# EAGLE board Frontboard2 (EAGLE 9.0.1)
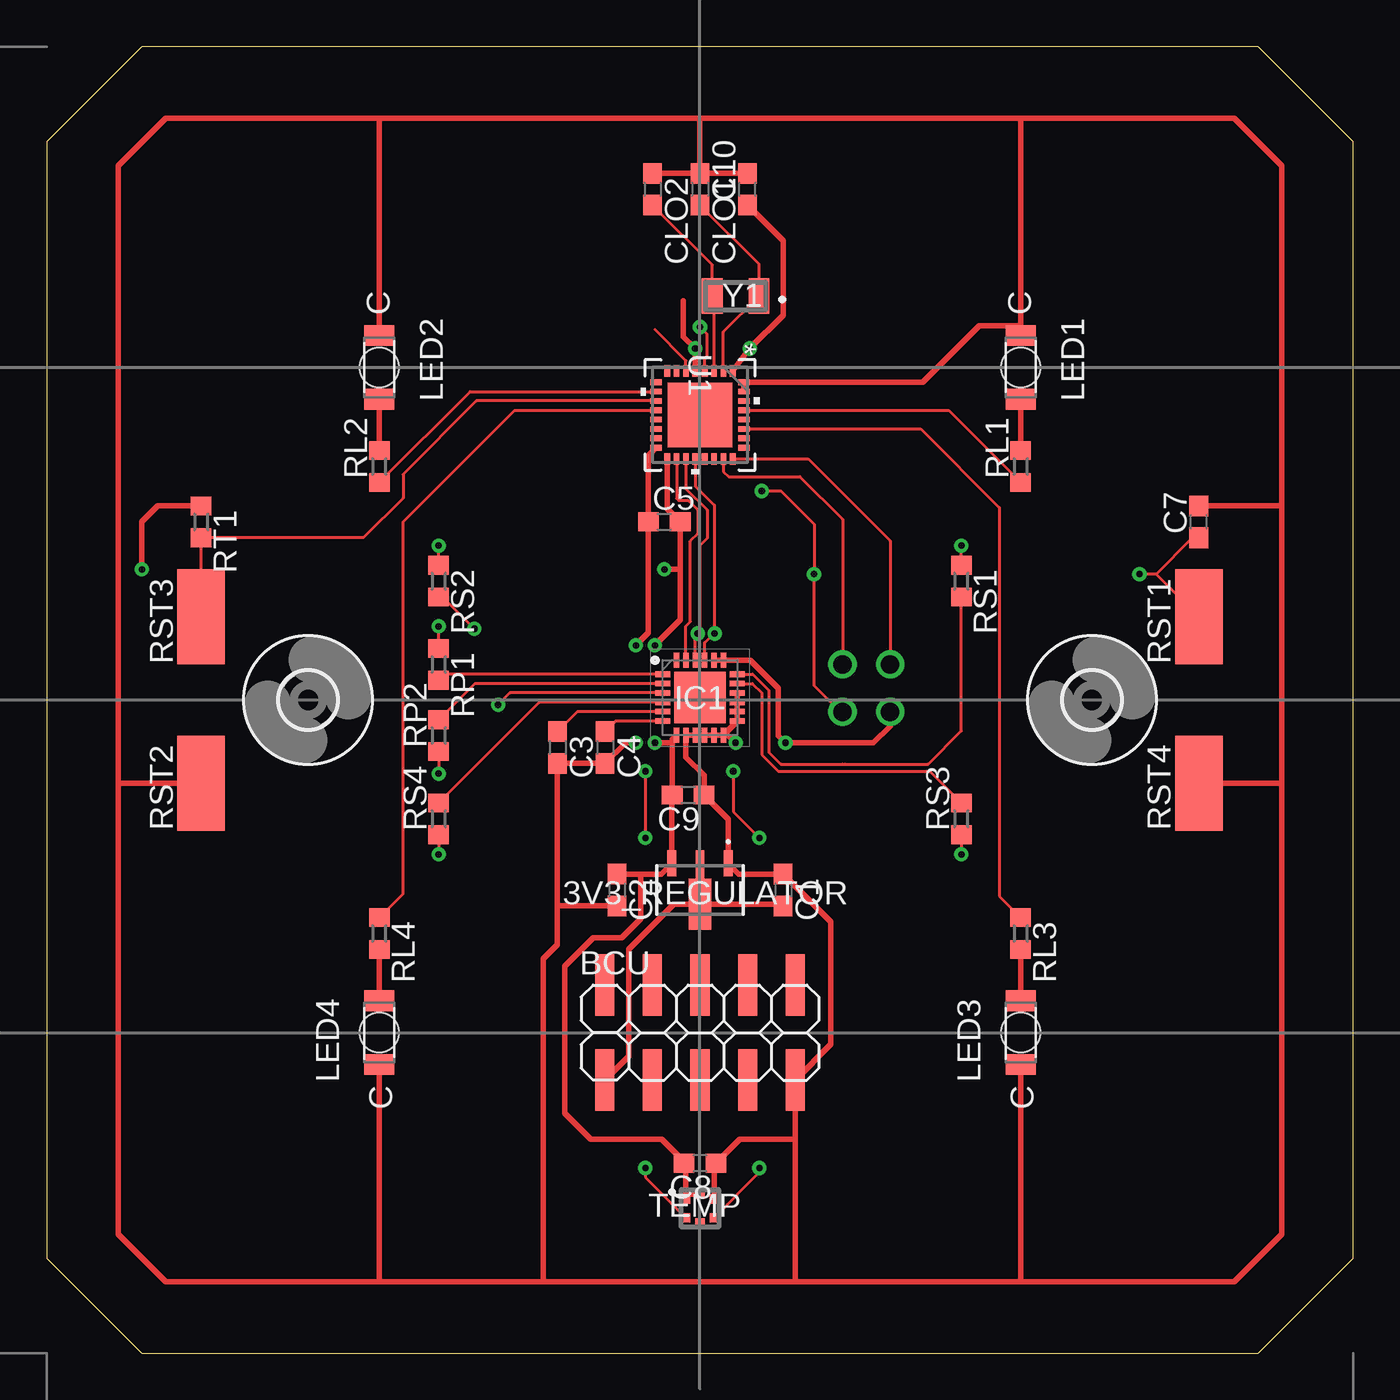
[diagram p0: board, top side]
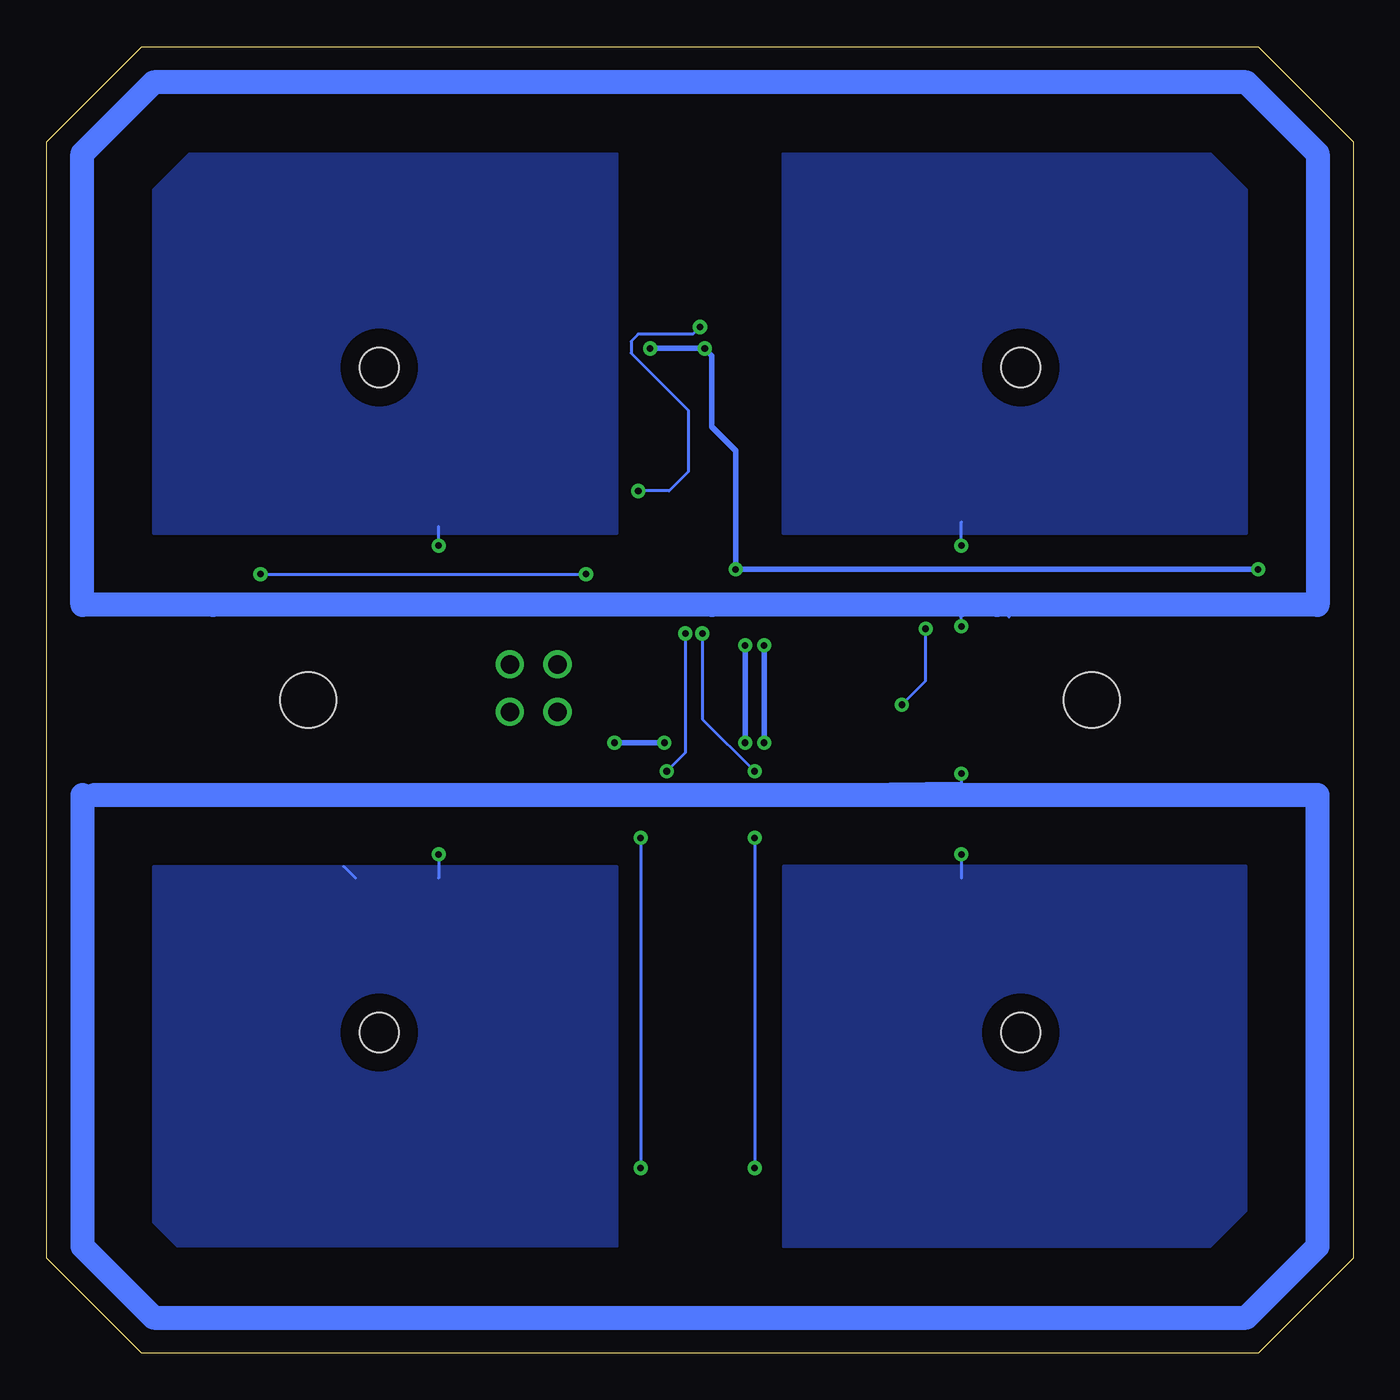
[diagram p1: board, bottom side, seen from below]

Size 69.85 x 69.85 mm. Coordinates in mm from the lower left corner, seen from the top.
Outline: 5.08,69.85 64.77,69.85 69.85,64.77 69.85,5.08 64.77,0 5.08,0 0,5.08 0,64.77 5.08,69.85
Outline: 6.34,69.84 5.08,69.85
Copper layers (1*16): Top 0.035mm / dielectric 1.5mm / Bottom 0.035mm
Design rules "default": minimum track width 6mil, minimum drill 0.35mm, track to track 6mil, track to pad 6mil, pad to pad 6mil, via to via 6mil, smd to smd 6mil, copper to edge 40mil, drill to drill 6mil, minimum pad ring 10mil, minimum via ring 8mil, stop-mask expansion 4mil, vias tented up to drill 0mil, thermal gap 10mil

## Footprints (pad centres in the part's own frame; a part is rotated, then mirrored left to right if it is on the bottom)
SOT-89(MB) = smd 0.48 x 1.4: 1 -1.5,-1.425; 3 1.5,-1.425 | smd 0.48 x 1.525: 2 0,-1.363 | smd 1.2 x 2.725: 4 0,0.76
2X05SMD = smd 1.016 x 3.302: 1 -1.27,-3.81; 2 -1.27,1.27; 3 1.27,-3.81; 4 1.27,1.27; 5 3.81,-3.81; 6 3.81,1.27; 7 6.35,-3.81; 8 6.35,1.27; 9 8.89,-3.81; 10 8.89,1.27
C0603 = smd 1.1 x 1: 1 -0.85,0; 2 0.85,0
QFN50P400X400X60-25N = smd 0.8 x 0.3: 1 -2,1.25; 2 -2,0.75; 3 -2,0.25; 4 -2,-0.25; 5 -2,-0.75; 6 -2,-1.25; 13 2,-1.25; 14 2,-0.75; 15 2,-0.25; 16 2,0.25; 17 2,0.75; 18 2,1.25 | smd 0.3 x 0.8: 7 -1.25,-2; 8 -0.75,-2; 9 -0.25,-2; 10 0.25,-2; 11 0.75,-2; 12 1.25,-2; 19 1.25,2; 20 0.75,2; 21 0.25,2; 22 -0.25,2; 23 -0.75,2; 24 -1.25,2 | smd 2.75 x 2.75: 25 0,0
WL-SMRW-1206-CYLDR-REVERSE-MOUNT = smd 1.1 x 1.6: 1 -1.7,0; 2 1.7,0 | hole 2.1: 0,0
R0603 = smd 1 x 1.1: 1 -0.85,0; 2 0.85,0
SMD2,54-5,08 = smd 2.54 x 5.08: 1 0,0
HLGA-6L = smd 0.45 x 0.5: 1 -0.75,0.5; 2 -0.75,-0.5; 4 0.75,-0.5; 5 0.75,0.5 | smd 0.5 x 0.45: 3 0,-0.75; 6 0,0.75
UFQFPN32-5X5MM = smd 0.61 x 0.305: 1 -2.35,1.75; 2 -2.35,1.25; 3 -2.35,0.75; 4 -2.35,0.25; 5 -2.35,-0.25; 6 -2.35,-0.75; 7 -2.35,-1.25; 8 -2.35,-1.75; 17 2.35,-1.75; 18 2.35,-1.25; 19 2.35,-0.75; 20 2.35,-0.25; 21 2.35,0.25; 22 2.35,0.75; 23 2.35,1.25; 24 2.35,1.75 | smd 0.305 x 0.61: 9 -1.75,-2.35; 10 -1.25,-2.35; 11 -0.75,-2.35; 12 -0.25,-2.35; 13 0.25,-2.35; 14 0.75,-2.35; 15 1.25,-2.35; 16 1.75,-2.35; 25 1.75,2.35; 26 1.25,2.35; 27 0.75,2.35; 28 0.25,2.35; 29 -0.25,2.35; 30 -0.75,2.35; 31 -1.25,2.35; 32 -1.75,2.35 | smd 3.454 x 3.454: 33 0,0
3,0 = hole 3: 0,0
ABS-07 = smd 1.1 x 1.9: 1 -1.25,0; 2 1.25,0

## Placement (x,y rotation side)
3V3_REGULATOR  MCP1703T-3302E_MB  [SOT-89(MB)]  34.92,24.77 180 top
BCU  BCU  [2X05SMD]  31.11,18.41 0 top
C1  1uF  [C0603]  39.37,24.77 270 top
C2  1uF  [C0603]  30.48,24.77 270 top
C3  2.2nF  [C0603]  27.3,32.38 270 top
C4  0.1uF  [C0603]  29.84,32.38 270 top
C5  100nf  [C0603]  33.02,44.45 0 top
C7  0.1uF  [C0603]  61.59,44.45 90 top
C8  100nf  [C0603]  34.92,10.16 180 top
C9  100nf  [C0603]  34.29,29.84 180 top
C10  100nf  [C0603]  37.47,62.23 90 top
CLO1  7pF  [C0603]  34.92,62.23 270 top
CLO2  7pf  [C0603]  32.38,62.23 270 top
IC1  CY8CMBR3116-LQXI  [QFN50P400X400X60-25N]  34.92,35.05 0 top
LED1  WL-SMRW156120BS75300-B_RVS-MOUNT  [WL-SMRW-1206-CYLDR-REVERSE-MOUNT]  52.07,52.7 270 top
LED2  WL-SMRW156120BS75300-B_RVS-MOUNT  [WL-SMRW-1206-CYLDR-REVERSE-MOUNT]  17.78,52.7 270 top
LED3  WL-SMRW156120BS75300-B_RVS-MOUNT  [WL-SMRW-1206-CYLDR-REVERSE-MOUNT]  52.07,17.14 90 top
LED4  WL-SMRW156120BS75300-B_RVS-MOUNT  [WL-SMRW-1206-CYLDR-REVERSE-MOUNT]  17.78,17.14 90 top
RL1  330E  [R0603]  52.07,47.41 90 top
RL2  330E  [R0603]  17.78,47.41 90 top
RL3  330E  [R0603]  52.07,22.44 270 top
RL4  330E  [R0603]  17.78,22.44 270 top
RP1  560E  [R0603]  20.95,36.83 270 top
RP2  560E  [R0603]  20.95,33.02 90 top
RS1  560E  [R0603]  48.9,41.27 270 top
RS2  560E  [R0603]  20.95,41.27 270 top
RS3  560E  [R0603]  48.9,28.57 90 top
RS4  560E  [R0603]  20.95,28.57 90 top
RST1  0  [SMD2,54-5,08]  61.59,39.37 0 top
RST2  0  [SMD2,54-5,08]  8.26,30.48 0 top
RST3  0  [SMD2,54-5,08]  8.26,39.37 0 top
RST4  0  [SMD2,54-5,08]  61.59,30.48 0 top
RT1  100K  [R0603]  8.26,44.45 270 top
TEMP  HTS221TR  [HLGA-6L]  34.92,7.75 0 top
U1  STM32L432KX  [UFQFPN32-5X5MM]  34.92,50.16 270 top
U$1  [3,0]  13.97,34.92 0 top
U$2  [3,0]  55.88,34.92 0 top
Y1  ABS07-32.768KHZ-7-T  [ABS-07]  36.83,56.52 180 top

## Library data of the parts
3V3_REGULATOR = MCP1703T-3302E_MB; ALLIED_NUMBER: 70047986; ALLIED_PRICE/STOCK: https://www.alliedelec.com/microchip-technology-inc-mcp1703t-3302e-mb/70047986/; ARROW_PART_NUMBER: MCP1703T-3302E/MB; ARROW_PRICE/STOCK: https://www.arrow.com/en/products/mcp1703t-3302emb/microchip-technology; DESCRIPTION: LDO Low Iq 250mA 16V 3.3V 2% SOT89 Microchip MCP1703T-3302E/MB, LDO Voltage Regulator, 250mA, 3.3 V 2%, 2.7 16 Vin, 3-Pin SOT-89; HEIGHT: mm; MANUFACTURER_NAME: Microchip; MANUFACTURER_PART_NUMBER: MCP1703T-3302E/MB; RS_PART_NUMBER: 9122916; RS_PRICE/STOCK: http://uk.rs-online.com/web/p/products/9122916
BCU = pinhead
C1-C5 C7-C10 CLO1 CLO2 = rcl; SPICEPREFIX: C
IC1 = CY8CMBR3116-LQXI; ARROW_PART_NUMBER: CY8CMBR3116-LQXI; ARROW_PRICE/STOCK: https://www.arrow.com/en/products/cy8cmbr3116-lqxi/cypress-semiconductor; DESCRIPTION: Touch Screen Controllers CapSense Express 16 Buttons; HEIGHT: 0.6mm; MANUFACTURER_NAME: Cypress Semiconductor; MANUFACTURER_PART_NUMBER: CY8CMBR3116-LQXI; RS_PART_NUMBER: 1242976P; RS_PRICE/STOCK: http://uk.rs-online.com/web/p/products/1242976P
LED1-LED4 = Wurth_Elektronik_Optoelectronics_rev15b (1)
RL1-RL4 RP1 RP2 RS1-RS4 RT1 = rcl; SPICEPREFIX: R
RST1-RST4 = wirepad
TEMP = HTS221TR; ARROW_PART_NUMBER: HTS221TR; ARROW_PRICE/STOCK: https://www.arrow.com/en/products/hts221tr/stmicroelectronics; DESCRIPTION: Humidity and Temperature Sensor HLGA6 STMicroelectronics HTS221TR Temperature & Humidity Sensor, -40 +120 C, 6-Pin HLGA; HEIGHT: mm; MANUFACTURER_NAME: STMicroelectronics; MANUFACTURER_PART_NUMBER: HTS221TR; RS_PART_NUMBER: 1660935; RS_PRICE/STOCK: http://uk.rs-online.com/web/p/products/1660935
U1 = STM32L432KC; MANUFACTURER_PART_NUMBER: stm32l432kx; VENDOR: ST Microelectronics
U$1 U$2 = holes
Y1 = ABS07-32.768KHZ-7-T; ARROW_PART_NUMBER: ABS07-32.768KHZ-7-T; ARROW_PRICE/STOCK: https://www.arrow.com/en/products/abs07-32.768khz-7-t/abracon; DESCRIPTION: ABRACON - ABS07-32.768KHZ-7-T - CRYSTAL, 32.768KHZ, 7PF, SMD; HEIGHT: mm; MANUFACTURER_NAME: ABRACON; MANUFACTURER_PART_NUMBER: ABS07-32.768KHZ-7-T; RS_PART_NUMBER: 1712773P; RS_PRICE/STOCK: http://uk.rs-online.com/web/p/products/1712773P

## Nets
+3V3: 3V3_REGULATOR.3 C2.1 C5.2 C8.2 C9.2 C10.1 IC1.7 RT1.1 TEMP.1 TEMP.6 U1.1 U1.5 U1.17
+5V: 3V3_REGULATOR.2 3V3_REGULATOR.4 BCU.1 C1.2
CMOD: C3.1 IC1.5
EP_GND: IC1.25
EXT_CLK: U1.6
GND: 3V3_REGULATOR.1 BCU.9 C1.1 C2.2 C3.2 C4.2 C5.1 C7.2 C8.1 C9.1 C10.2 CLO1.1 CLO2.1 IC1.8 IC1.9 IC1.10 IC1.11 IC1.12 IC1.13 IC1.14 IC1.15 IC1.16 IC1.19 IC1.20 LED1.1 LED2.1 LED3.1 LED4.1 RST2.1 RST4.1 TEMP.5 U1.16 U1.31 U1.32
HOST_INT: IC1.23 U1.18
I2C_SCL: IC1.22 TEMP.2 U1.19
I2C_SDA: IC1.21 TEMP.4 U1.20
IC_SENS_1: IC1.18 RS1.2
IC_SENS_2: IC1.3 RS2.2
IC_SENS_3: IC1.17 RS3.2
IC_SENS_4: IC1.4 RS4.2
IC_SENS_PROX_1: IC1.1 RP1.2
IC_SENS_PROX_2: IC1.2 RP2.2
LED1: RL1.1 U1.29
LED2: RL2.1 U1.10
LED3: RL3.1 U1.27
LED4: RL4.1 U1.12
N$19: LED1.2 RL1.2
N$20: LED2.2 RL2.2
N$21: LED3.2 RL3.2
N$22: LED4.2 RL4.2
NRST: C7.1 RST1.1 U1.4
OSC32_IN: CLO1.2 U1.2 Y1.1
OSC32_OUT: CLO2.2 U1.3 Y1.2
PRG: RST3.1 RT1.2 U1.11
RXD: BCU.7
SENS_1: RS1.1
SENS_2: RS2.1
SENS_3: RS3.1
SENS_4: RS4.1
SENS_PROX_1: RP1.1
SENS_PROX_2: RP2.1
SWCLK: U1.24
SWDIO: U1.23
TXD: BCU.3
VCC: C4.1 IC1.6

## Tracks (layer width: path | path; a pad name or v marks a point on that pad's centre or on a via)
+3V3  (via drill 0.35)
  Top 0.305: C2.1 31.75,25.61 | 31.75,25.61 32.85,25.61 3V3_REGULATOR.3 33.42,29.83 C9.2 33.44,32.64 | 33.44,32.64 33.44,32.82 IC1.7 | 33.87,41.91 33.87,39.2 v32.51,37.85 | 33.87,41.91 C5.2 33.17,45.15 U1.17 | U1.5 v34.67,53.72 34.04,54.36 34.04,56.26 | U1.1 v37.59,53.72 39.37,55.5 39.37,59.48 C10.1 | v32.51,32.64 33.44,32.64 | 33.87,41.91 v33.02,41.91 | TEMP.1 34.17,8.51 | 34.17,8.51 34.17,10.06 | 34.17,10.06 C8.2 | TEMP.6 34.19,8.5 34.17,8.51 | 31.75,25.61 31.75,23.24 30.73,22.23 29.21,22.23 27.69,20.7 27.69,12.83 29.08,11.43 32.89,11.43 34.17,10.15 34.17,10.06 | v5.08,41.91 5.08,44.45 5.93,45.3 RT1.1
  Bottom 0.305: v37.59,53.72 v34.67,53.72 34.29,53.34 34.29,49.53 33.02,48.26 v33.02,41.91 v5.08,41.91 | v32.51,37.85 v32.51,32.64
+5V
  Top 0.305: C1.2 39.28,24 3V3_REGULATOR.4 | 3V3_REGULATOR.2 3V3_REGULATOR.4 | BCU.1 31.11,15.88 31.11,21.59 33.53,24 3V3_REGULATOR.4
CMOD
  Top 0.152: IC1.5 28.37,34.3 C3.1
EXT_CLK
  Top 0.152: U1.6 34.17,53.07 32.52,54.73
GND  (via drill 0.35, 1)
  Top 0.152: IC1.9 IC1.10 35.56,33.05 IC1.11 | IC1.13 IC1.14 IC1.15 IC1.16
  Top 0.305: BCU.9 40.01,15.88 | RST2.1 3.81,30.48 | 52.07,14.93 LED3.1 52.07,3.81 | RST4.1 66.04,30.48 | 3.81,30.48 3.81,6.35 6.35,3.81 17.78,3.81 | 17.78,3.81 26.54,3.81 | 26.54,3.81 40.01,3.81 | 40.01,3.81 52.07,3.81 | 52.07,3.81 63.5,3.81 66.04,6.35 66.04,30.48 | 17.78,66.04 6.35,66.04 3.81,63.5 3.81,30.48 | 17.78,66.04 34.92,66.04 | 34.92,66.04 52.07,66.04 | 52.07,66.04 63.5,66.04 66.04,63.5 66.04,45.21 | 66.04,45.21 66.04,30.48 | LED2.1 17.78,55.24 17.78,66.04 | LED1.1 52.07,54.92 | 52.07,54.92 52.07,66.04 | LED4.1 17.78,3.81 | BCU.9 41.91,16.51 41.91,23.07 C1.1 37,25.61 3V3_REGULATOR.1 36.42,28.56 C9.1 35.14,30.9 34.17,31.86 IC1.8 IC1.9 35.56,33.05 | BCU.9 40.01,11.43 | 40.01,11.43 40.01,3.81 | U1.31 U1.32 46.84,51.91 49.84,54.92 52.07,54.92 | U1.16 32.17,48.01 C5.1 32.17,38.52 v31.5,37.85 | CLO2.1 C10.2 CLO1.1 34.92,66.04 | v31.5,32.64 30.95,32.64 C4.2 C3.2 27.3,23.88 | IC1.11 IC1.12 | IC1.12 IC1.13 IC1.16 | IC1.12 36.42,33.05 v36.83,32.64 | 36.17,37.19 IC1.19 | IC1.19 IC1.20 | v45.09,34.29 45.09,33.53 44.2,32.64 v39.5,32.64 39.12,33.02 39.12,35.56 37.62,37.05 IC1.19 | C7.2 65.95,45.3 66.04,45.21 | TEMP.5 35.67,10.06 C8.1 37.05,11.43 40.01,11.43 | 26.54,3.81 26.54,21.08 27.3,21.84 27.3,23.88 | C2.2 27.34,23.91 27.3,23.88
  Bottom 0.305: v31.5,37.85 v31.5,32.64 | v36.83,32.64 v39.5,32.64
HOST_INT
  Top 0.152: IC1.23 34.17,38.87 34.42,39.12 34.42,43.43 34.8,43.81 34.8,45.09 34.29,45.59 33.78,45.59 33.67,45.7 U1.18
I2C_SCL  (via drill 0.35)
  Top 0.152: IC1.22 34.67,38.36 v34.8,38.48 34.92,38.61 34.92,43.18 35.31,43.56 35.31,45.09 34.17,46.22 U1.19 | v32,31.11 v32,27.56 | v32,9.91 32,9.42 TEMP.2
  Bottom 0.152: v34.8,38.48 34.8,33.91 v32,31.11 | v32,27.56 v32,9.91
I2C_SDA  (via drill 0.35)
  Top 0.152: U1.20 34.67,46.35 35.69,45.34 35.69,38.5 | 35.69,38.5 v35.71,38.48 | IC1.21 35.17,37.99 35.69,38.5 | v36.7,31.11 36.7,28.96 v38.1,27.56 | v38.1,9.91 38.1,9.67 TEMP.4
  Bottom 0.152: v35.71,38.48 35.71,32.11 v36.7,31.11 | v38.1,27.56 v38.1,9.91
IC_SENS_1
  Top 0.152: IC1.18 37.74,36.3 38.61,35.43 38.61,32.13 39.24,31.5 42.55,31.5 42.67,31.5 47.12,31.5 48.9,33.27 RS1.2
IC_SENS_2  (via drill 0.35)
  Top 0.152: IC1.3 24.76,35.3 v24.13,34.67 | v22.86,38.73 21.17,40.42 RS2.2
  Bottom 0.152: v24.13,34.67 22.86,35.94 v22.86,38.73
IC_SENS_3
  Top 0.152: IC1.17 37.73,35.8 38.23,35.31 38.23,32 39.12,31.11 47.2,31.11 RS3.2
IC_SENS_4
  Top 0.152: IC1.4 26.33,34.8 RS4.2
IC_SENS_PROX_1
  Top 0.152: IC1.1 21.28,36.3 RP1.2
IC_SENS_PROX_2
  Top 0.152: IC1.2 22.89,35.8 RP2.2
LED1
  Top 0.152: U1.29 48.22,50.41 RL1.1
LED2
  Top 0.152: RL2.1 22.64,51.41 U1.10
LED3
  Top 0.152: 52.07,23.58 RL3.1 50.93,24.43 50.93,45.21 46.72,49.41 U1.27
LED4
  Top 0.152: RL4.1 19.05,24.56 19.05,44.45 25.02,50.41 U1.12
N$19
  Top 0.305: LED1.2 RL1.2
N$20
  Top 0.305: LED2.2 RL2.2
N$21
  Top 0.305: LED3.2 RL3.2
N$22
  Top 0.305: LED4.2 RL4.2
NRST  (via drill 0.35, 1)
  Top 0.152: U1.4 35.17,53.21 35.31,53.34 35.31,54.48 v34.92,54.86 | v42.55,34.29 42.42,34.29 41.02,35.69 v41.02,41.66 41.02,44.32 39.24,46.1 v38.23,46.1 | RST1.1 59.31,41.66 | 59.31,41.66 v58.42,41.66 | 59.31,41.66 61.25,43.6 C7.1
  Bottom 0.152: v34.92,54.86 35.31,54.48 38.23,54.48 38.61,54.1 38.61,53.47 35.56,50.42 35.56,47.12 36.58,46.1 v38.23,46.1 | v58.42,41.66 v41.02,41.66
OSC32_IN
  Top 0.152: U1.2 36.17,54.61 Y1.1 38.08,58.23 CLO1.2
OSC32_OUT
  Top 0.152: CLO2.2 35.58,58.19 Y1.2 35.67,56.42 U1.3
PRG
  Top 0.152: RST3.1 RT1.2 16.93,43.6 19.05,45.72 19.05,46.99 22.98,50.91 U1.11
SENS_1  (via drill 0.35)
  Top 0.152: RS1.1 v48.9,43.18
  Bottom 0.152: v48.9,43.18 48.9,44.2
  pour Bottom: 39.37,43.81 64.14,43.81 64.14,62.23 62.23,64.14 39.37,64.14
SENS_2  (via drill 0.35)
  Top 0.152: RS2.1 v20.95,43.18
  Bottom 0.152: v20.95,43.18 20.95,44.45
  pour Bottom: 5.71,62.23 5.71,43.81 30.48,43.81 30.48,64.14 7.62,64.14
SENS_3  (via drill 0.35)
  Top 0.152: RS3.1 v48.9,26.67
  Bottom 0.152: 53.98,26.04 53.34,25.4 | v48.9,26.67 48.9,25.4
  pour Bottom: 39.37,5.71 62.87,5.71 64.14,6.99 64.14,26.04 39.37,26.04
SENS_4  (via drill 0.35)
  Top 0.152: RS4.1 v20.95,26.67
  Bottom 0.152: v20.95,26.67 20.95,25.4
  pour Bottom: 5.71,26.04 30.48,26.04 30.48,5.71 7.62,5.71 5.71,7.62
SENS_PROX_1  (via drill 0.35)
  Top 0.152: RP1.1 v20.95,38.86
  Bottom 0.152: 18.41,39.37 18.99,39.94 | 18.99,39.94 19.05,40.01 | 19.05,39.88 18.99,39.94 | v20.95,38.86 20.95,40.01
  Bottom 1.27: 5.71,67.94 64.14,67.94 67.94,64.14 67.94,40.01 60.96,40.01 34.29,40.01 20.95,40.01 19.05,40.01 1.91,40.01 1.91,64.14 5.71,67.94
SENS_PROX_2  (via drill 0.35)
  Top 0.152: RP2.1 v20.95,30.99
  Bottom 0.152: v20.95,30.99 20.95,30.48 67.31,29.84
  Bottom 1.27: 67.31,29.84 1.91,29.84 1.91,5.71 5.71,1.91 64.14,1.91 67.94,5.71 67.94,29.84
SWCLK  (via drill 1)
  Top 0.152: U1.24 40.7,47.81 45.09,43.43 v45.09,36.83
SWDIO  (via drill 1)
  Top 0.152: U1.23 36.17,47.14 36.45,46.86 40.26,46.86 42.55,44.58 v42.55,36.83
VCC
  Top 0.152: IC1.6 30.41,33.8 C4.1